# Altium PCB 3D_Scanner_PCB.PcbDoc
Units mm, origin at the board's own origin, x right, y up, seen from the top; angles counter-clockwise.
Board outline 93 x 105 mm, 2 copper layers (Top Layer, Bottom Layer); 20 components, 24 nets, 143 pads, 12 vias.
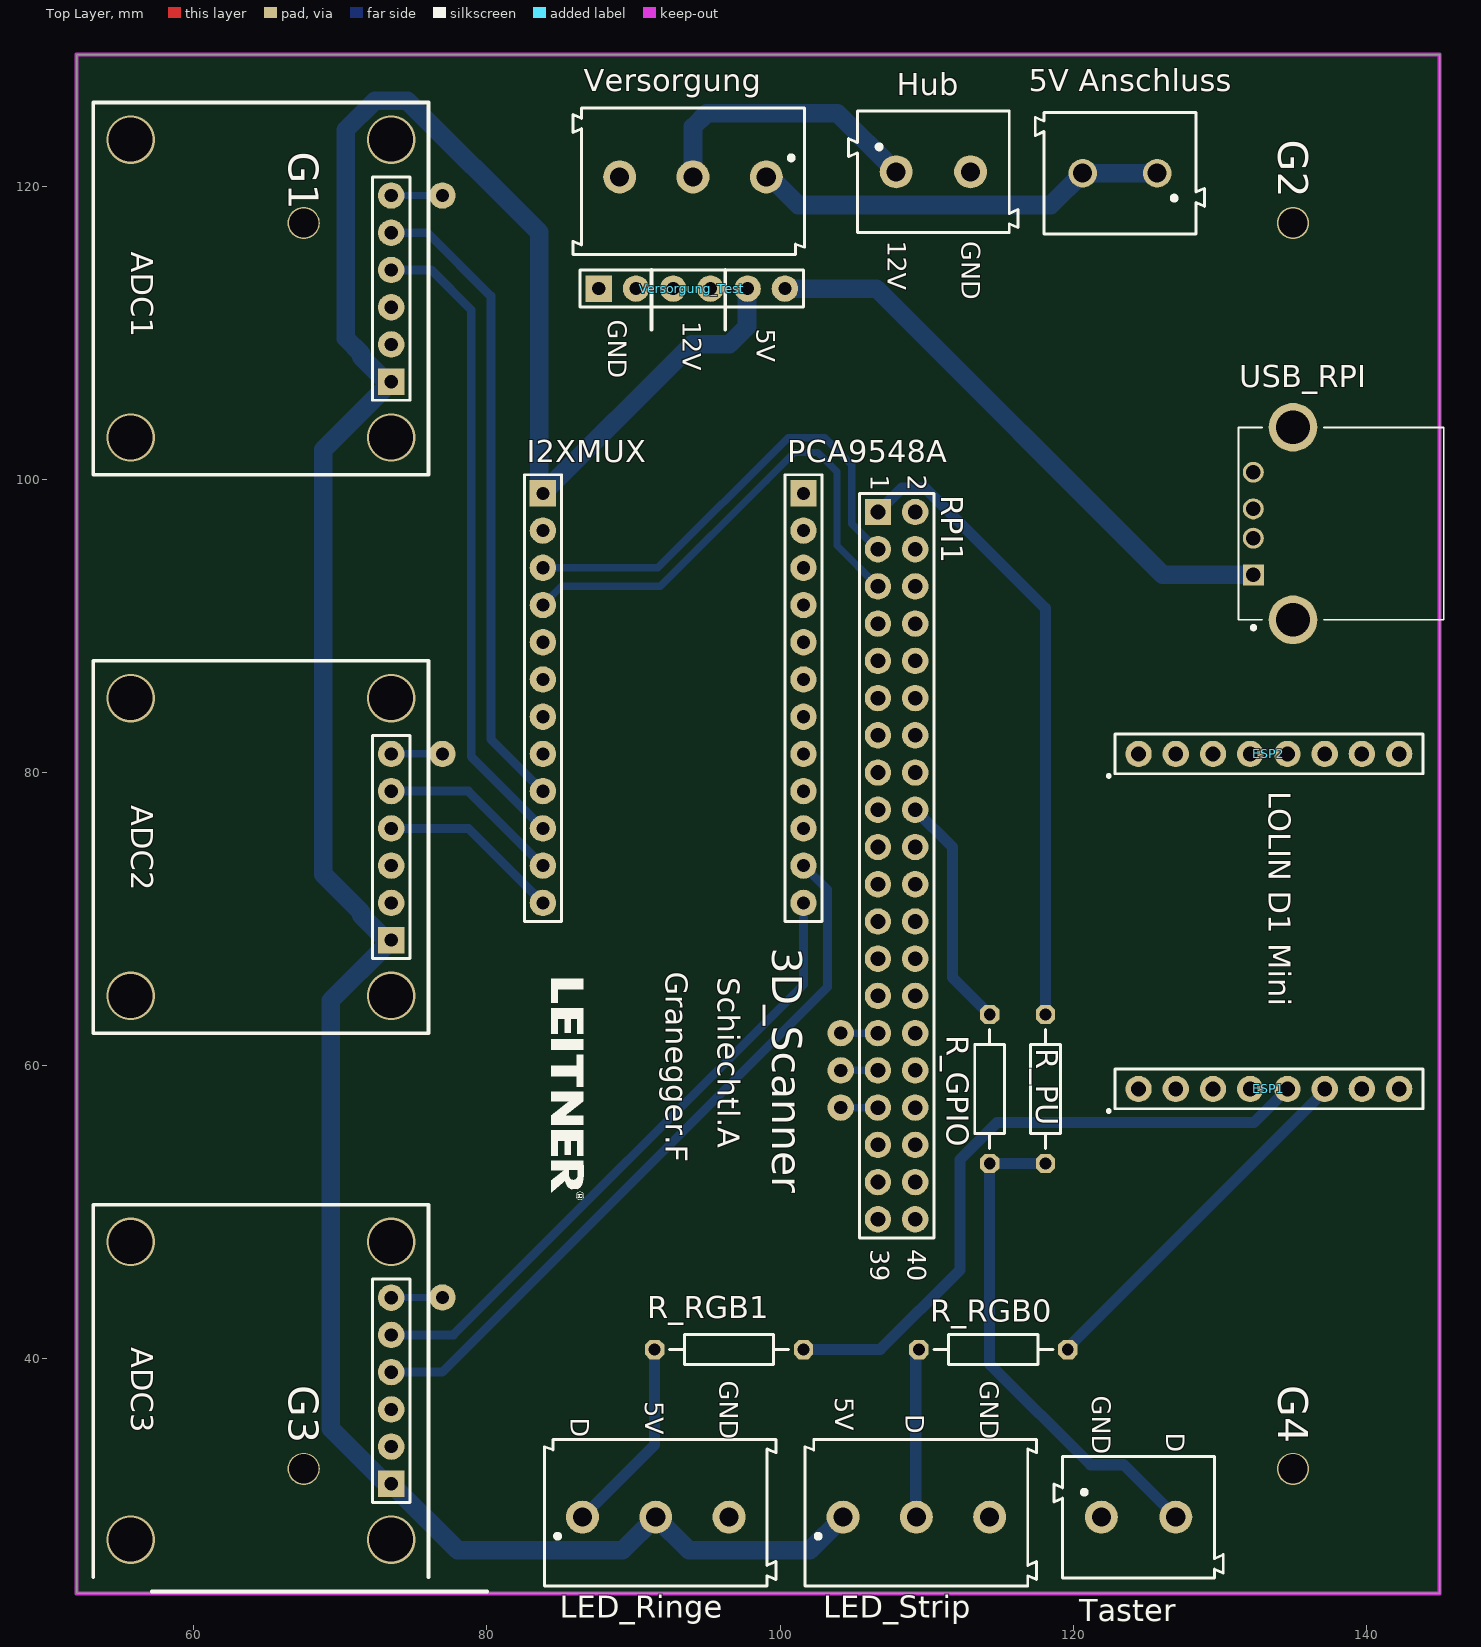
[diagram p0: Top Layer view]
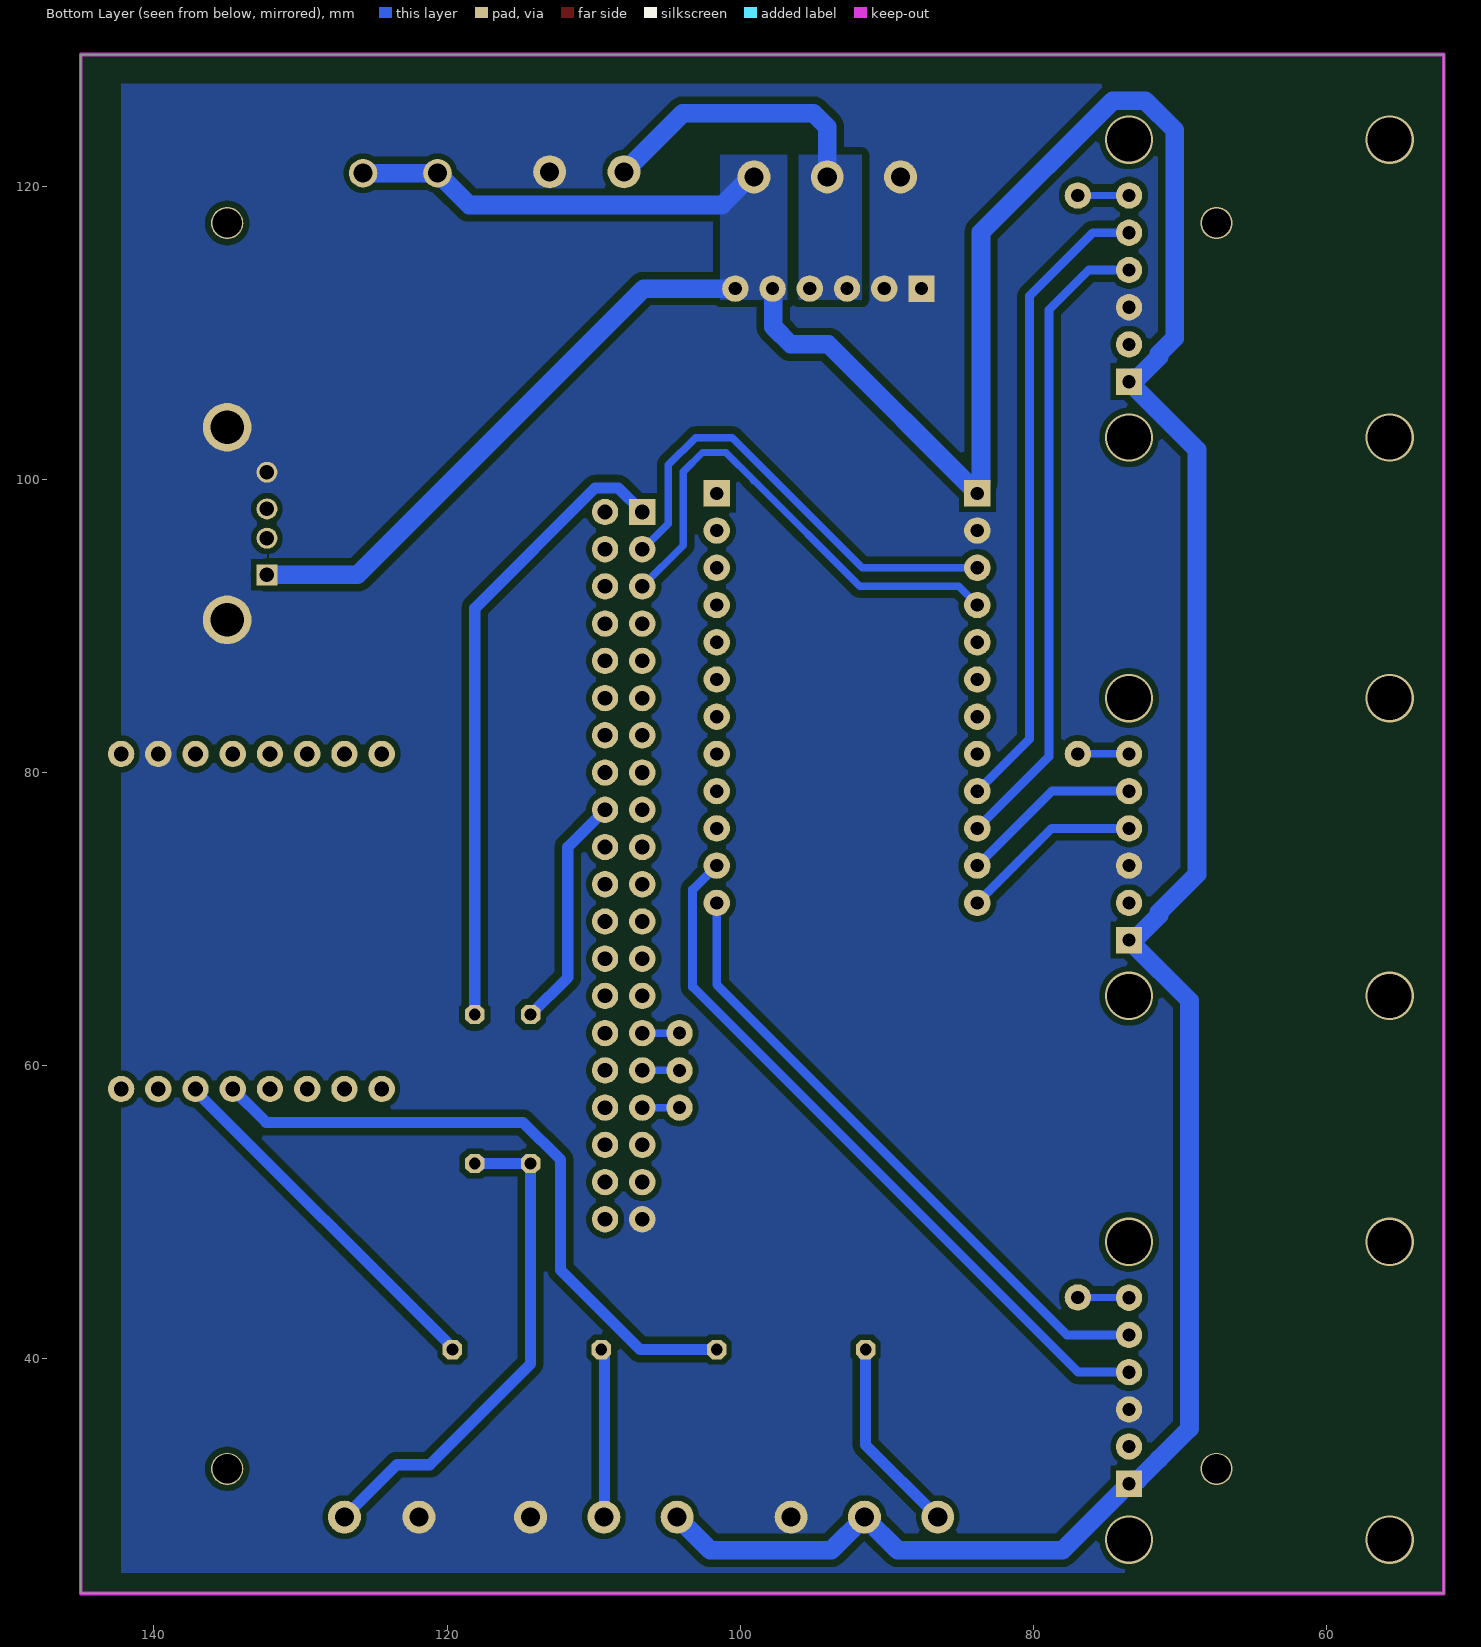
[diagram p1: Bottom Layer view, seen from below]
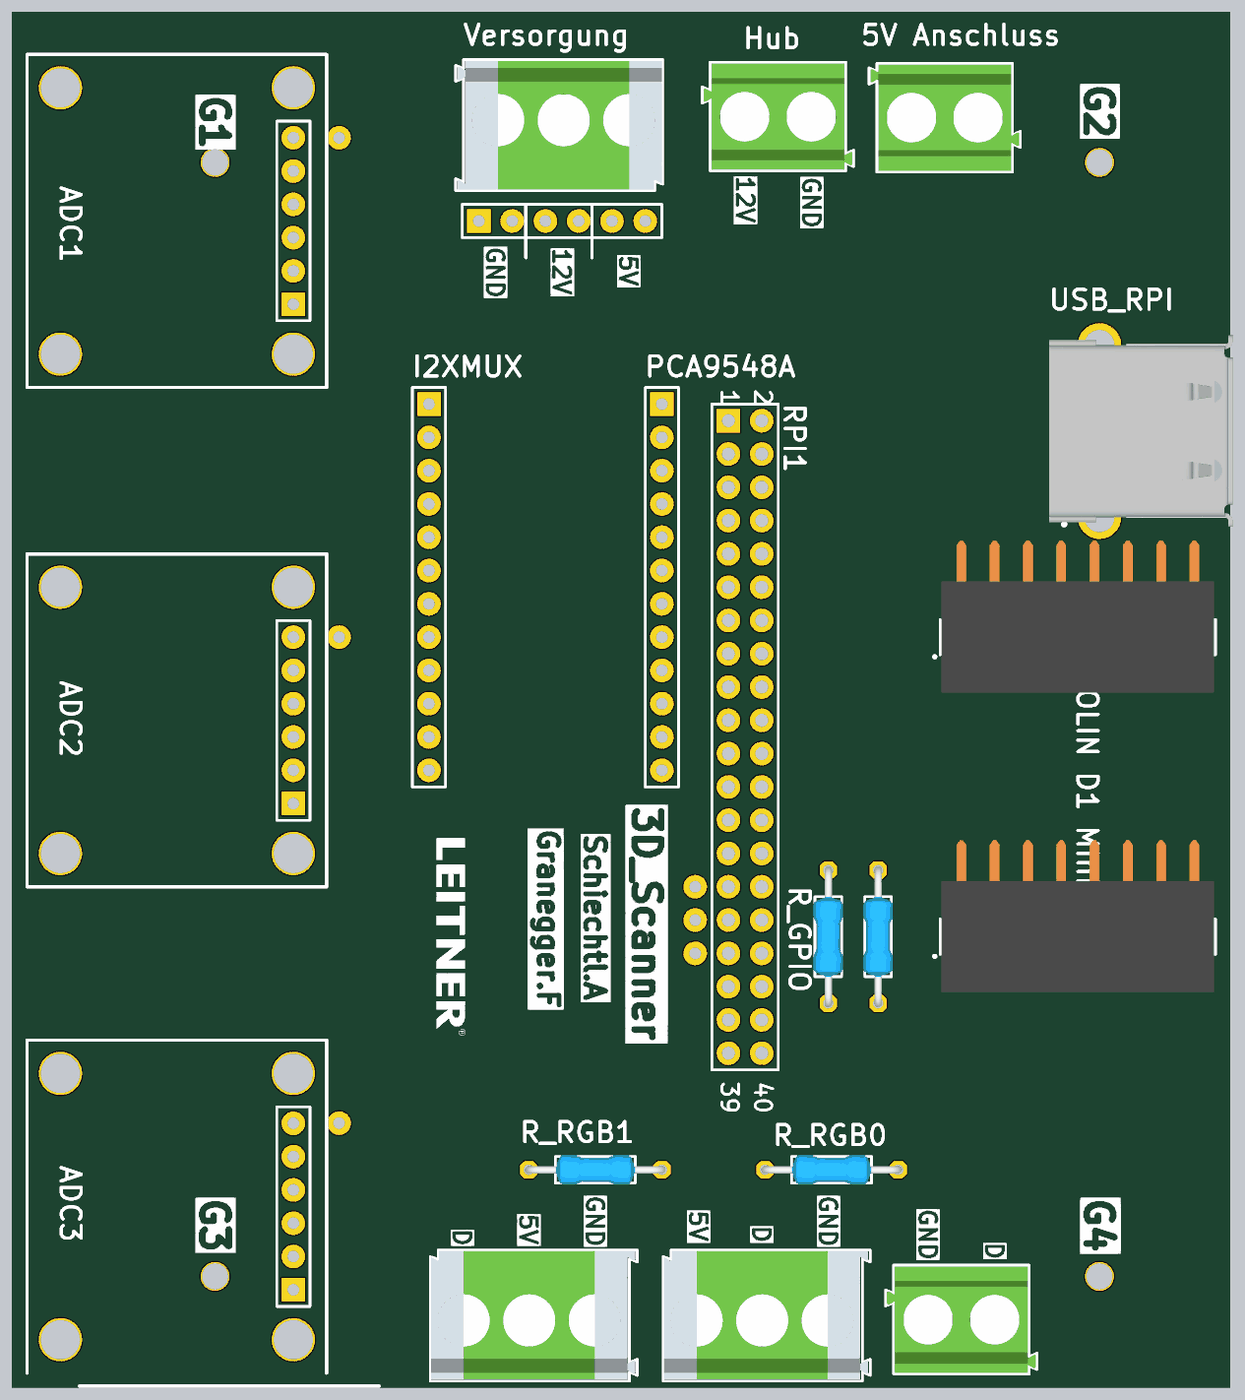
[diagram p2: 3D render of the assembled board from above, using the file's embedded part models]

## Layer stack, top to bottom
Top Solder: solder mask 0.0102, Solder Resist, Dk 3.5
Top Layer: signal copper 0.0356
Dielectric 1: dielectric 0.32, FR-4, Dk 4.8
Bottom Layer: signal copper 0.0356
Bottom Solder: solder mask 0.0102, Solder Resist, Dk 3.5

## Board outline
52,24 52,129 145,129 145,24

## Design rules (kind name [scope] priority, off if disabled: settings)
Clearance [All] p1: gap=0.381 ignorepadtopadclearanceinfootprint=FALSE except(0.508: Arc-Arc Arc-Track Arc-THPad Arc-Fill Arc-Poly Arc-Region Track-Track Track-THPad Track-Fill Track-Poly Track-Region Fill-Fill Fill-Poly Fill-Region Fill-Text Fill-Hole Poly-Poly Poly-Region Poly-Text Poly-Hole Region-Region Region-Text Region-Hole)
PlaneClearance [InNet('No Net')] p1: clearance=0.508
PlaneConnect [All] p1: planeconnectstyle=Direct reliefexpansion=0.508 reliefentries=4 reliefconductorwidth=0.254 reliefairgap=0.254
PolygonConnect [All] p1: connectstyle=Direct reliefconductorwidth=0.254 reliefentries=4 polygonreliefangle="90 Angle" airgapwidth=0.254
RoutingVias [All] p1: holewidth=0.711 width=1.27 viastyle="Through Hole" minholewidth=0.711 minwidth=1.27 maxholewidth=0.711 maxwidth=1.27
SolderMaskExpansion [All] p1: expansion=0.102 istentingtop=FALSE
SupplyNets "Schematic Supply Nets_20" [InNet('D3_1')] p1: voltage=0.000
SupplyNets "Schematic Supply Nets_19" [InNet('D3_2')] p2: voltage=0.000
SupplyNets "Schematic Supply Nets_9" [InNet('D2_2')] p3: voltage=0.000
SupplyNets "Schematic Supply Nets_8" [InNet('D2_1')] p4: voltage=0.000
SupplyNets "Schematic Supply Nets_6" [InNet('D1_2')] p5: voltage=0.000
SupplyNets "Schematic Supply Nets_5" [InNet('D1_1')] p6: voltage=0.000
SupplyNets "Schematic Supply Nets_4" [InNet('GPIO_BTN')] p7: voltage=0.000
SupplyNets "Schematic Supply Nets_3" [InNet('3V3')] p8: voltage=0.000
SupplyNets "Schematic Supply Nets_18" [InNet('SDA2')] p9: voltage=0.000
SupplyNets "Schematic Supply Nets_17" [InNet('SDA3')] p10: voltage=0.000
SupplyNets "Schematic Supply Nets_16" [InNet('SCL2')] p11: voltage=0.000
SupplyNets "Schematic Supply Nets_15" [InNet('SCL3')] p12: voltage=0.000
SupplyNets "Schematic Supply Nets_14" [InNet('SDA1')] p13: voltage=0.000
SupplyNets "Schematic Supply Nets_13" [InNet('SCL1')] p14: voltage=0.000
SupplyNets "Schematic Supply Nets_12" [InNet('SCL')] p15: voltage=0.000
SupplyNets "Schematic Supply Nets_11" [InNet('PWM0')] p16: voltage=0.000
SupplyNets "Schematic Supply Nets_10" [InNet('SDA')] p17: voltage=0.000
SupplyNets "Schematic Supply Nets_7" [InNet('PWM1')] p18: voltage=0.000
SupplyNets "Schematic Supply Nets_2" [InNet('+5V')] p19: voltage=0.000
SupplyNets "Schematic Supply Nets_1" [InNet('GND')] p20: voltage=0.000
SupplyNets "Schematic Supply Nets" [InNet('+12V')] p21: voltage=0.000
Width [All] p1: maxlimit=1.27 minlimit=0.254 preferedwidth=0.254 minimp=50.000000 maximp=50.000000 favimp=50.000000
28 further rules are at their usual default settings.

## Components (designator, comment, footprint, x,y, rotation, side; value= is the part's Value field where it differs from the comment)
"5V Anschluss" "691213510002" 691213510002#1 123.19,120.904 r180 top
ADC1 "NAU7802" HDR1X6 73.47,106.68 r90 top
ADC2 "NAU7802" HDR1X6 73.47,68.58 r90 top
ADC3 "NAU7802" HDR1X6 73.47,31.48 r90 top
ESP1 "6130XX11821_61300811821" 61300811821 133.35,58.42 r0 top
ESP2 "6130XX11821_61300811821" 61300811821 133.35,81.28 r0 top
Hub "691213510002" 691213510002#2 110.46,121 r0 top
I2XMUX "Header 12" HDR1X12 83.82,99.06 r270 top
LED_Ringe "691216710003" 691216710003 91.52,29.21 r0 top
LED_Strip "691216710003" 691216710003 109.3,29.21 r0 top
PCA9548A "Header 12" HDR1X12 101.6,99.06 r270 top
R_GPIO "330R" R_0207/RM4 114.3,58.42 r270 top
R_PU "100K" R_0207/RM4 118.11,58.42 r270 top
R_RGB0 "330R" R_0207/RM4 114.554,40.64 r180 top
R_RGB1 "330R" R_0207/RM4 96.52,40.64 r180 top
RPI1 "Raspberry Pi 5" HDR2X20 106.68,97.79 r270 top
Taster "691213510002" 691213510002#2 124.46,29.21 r0 top
USB_RPI "6364372-2" TE_6364372-2 135,97 r90 top
Versorgung "691216710003" 691216710003 94.06,120.65 r180 top
Versorgung_Test "Aditional Pins" HDR1X6 87.63,113.03 r0 top

## Footprints (in the part's own frame and the unit in brackets; to place one, negate y for a bottom-side part, rotate by r counter-clockwise, add the part's x,y. Pads: shape width x height; smd on the part's side, far side on the other; paste and mask are expansions set on the pad)
61300811821 [mm]
  round 1.8 hole 1: 1(-8.89,0) 2(-6.35,0) 3(-3.81,0) 4(-1.27,0) 5(1.27,0) 6(3.81,0) 7(6.35,0) 8(8.89,0)
  silkscreen extent -11.02,-1.6 10.51,1.35, body extent -10.41,-4.25 10.41,7.36, height 1.25
691213510002#1 [mm]
  round 1.95 hole 1.3: 1(-2.54,0) 2(2.54,0)
  silkscreen extent -5.78,-4.15 5.78,4.15, body extent -5.68,-4.06 5.68,4.04, height 10
691213510002#2 [mm]
  round 2.25 hole 1.3: 1(-2.54,0) 2(2.54,0)
  silkscreen extent -5.78,-4.15 5.78,4.15, body extent -5.68,-4.06 5.68,4.04, height 10
691216710003 [mm]
  round 2.25 hole 1.3: 1(-5,0) 2(0,0) 3(5,0)
  silkscreen extent -7.6,-4.7 8.2,5.3, body extent -7.55,-4.57 8.05,5.23, height 13.8
HDR1X6 [mm] "Connector; Header; 6 Position"
  rect 1.8x1.8 hole 0.9: 1(0,0)
  round 1.8 hole 0.9: 2(2.54,0) 3(5.08,0) 4(7.62,0) 5(10.16,0) 6(12.7,0)
  silkscreen extent -1.27,-1.27 13.97,1.27
HDR1X12 [mm] "Connector; Header; 12 Position"
  rect 1.8x1.8 hole 0.9: 1(0,0)
  round 1.8 hole 0.9: 2(2.54,0) 3(5.08,0) 4(7.62,0) 5(10.16,0) 6(12.7,0) 7(15.24,0) 8(17.78,0) 9(20.32,0) 10(22.86,0) 11(25.4,0) 12(27.94,0)
  silkscreen extent -1.27,-1.27 29.21,1.27
HDR2X20 [mm] "Connector; Header; 20x2 Position"
  rect 1.8x1.8 hole 1: 1(0,0)
  round 1.8 hole 1: 2(0,2.54) 3(2.54,0) 4(2.54,2.54) 5(5.08,0) 6(5.08,2.54) 7(7.62,0) 8(7.62,2.54) 9(10.16,0) 10(10.16,2.54) 11(12.7,0) 12(12.7,2.54) 13(15.24,0) 14(15.24,2.54) 15(17.78,0) 16(17.78,2.54) 17(20.32,0) 18(20.32,2.54) 19(22.86,0) 20(22.86,2.54) 21(25.4,0) 22(25.4,2.54) 23(27.94,0) 24(27.94,2.54) 25(30.48,0) 26(30.48,2.54) 27(33.02,0) 28(33.02,2.54) 29(35.56,0) 30(35.56,2.54) 31(38.1,0) 32(38.1,2.54) 33(40.64,0) 34(40.64,2.54) 35(43.18,0) 36(43.18,2.54) 37(45.72,0) 38(45.72,2.54) 39(48.26,0) 40(48.26,2.54)
  silkscreen extent -1.27,-1.27 49.53,3.81
R_0207/RM4 [mil] "type 0207, RM4"
  oct 52x52 hole 31.5: 1(-200,0) 2(200,0)
  silkscreen extent -160,-40 160,40, body extent -211,-44 211,44, height 94
TE_6364372-2 [mm]
  rect 1.428x1.428 / inner round 1.428 / far side rect 1.428x1.428 hole 1: 1(-3.5,2.71)
  round 1.428 hole 1: 2(-1,2.71) 3(1,2.71) 4(3.5,2.71)
  round 3.316 hole 2.3: SH1(-6.57,0) SH2(6.57,0)
  silkscreen extent -7.2,-10.28 6.57,3.72, body extent -7.31,-10.16 7.31,3.84, height 7.43

## Part data
"5V Anschluss" Hub Taster: "2 Position Wire to Board Terminal Block Horizontal with Board 0.200 (5.08mm) Through Hole", Package=None, Check_prices=https://www.snapeda.com/parts/691213510002/W%25C3%25BCrth+Elektronik+Midcom/view-part/?ref=eda, MF="WÃ¼rth Elektronik", MP=691213510002, SnapEDA_Link=https://www.snapeda.com/parts/691213510002/W%25C3%25BCrth+Elektronik+Midcom/view-part/?ref=snap
ADC1 ADC2 ADC3 Versorgung_Test: library part "Header 6", "Header, 6-Pin", LatestRevisionDate=17-Jul-2002, LatestRevisionNote="Re-released for DXP Platform.", Publisher="Altium Limited"
ESP1 ESP2: "Female header Temperature range: -40 ... +125 Â°C Colour: Black Connector Design: Single Row / Straight / Without Shroud Connector Termination: THT Contact material: Gold-Plated Copper Gender of contacts: Female Housing Material: Polybutylene Terephthalat", Package=None, Check_prices=https://www.snapeda.com/parts/61300811821/W%25C3%25BCrth+Elektronik+Midcom/view-part/?ref=eda, MF="WÃ¼rth Elektronik", MP=61300811821, SnapEDA_Link=https://www.snapeda.com/parts/61300811821/W%25C3%25BCrth+Elektronik+Midcom/view-part/?ref=snap
I2XMUX PCA9548A: "Header, 12-Pin", LatestRevisionDate=17-Jul-2002, LatestRevisionNote="Re-released for DXP Platform.", Publisher="Altium Limited"
LED_Ringe LED_Strip Versorgung: "5.00 MM TERMINAL BLOCK;", Package=None, Check_prices=https://www.snapeda.com/parts/691216710003/W%25C3%25BCrth+Elektronik+Midcom/view-part/?ref=eda, MF="WÃ¼rth Elektronik", MP=691216710003, SnapEDA_Link=https://www.snapeda.com/parts/691216710003/W%25C3%25BCrth+Elektronik+Midcom/view-part/?ref=snap
R_GPIO R_PU R_RGB0 R_RGB1: library part R, "Resistor", LatestRevisionDate=07-Sep-2019, Published=21-Feb-2011, Usage="only permitted for non-commercial purposes at HTL I Innsbruck"
RPI1: library part "Header 20X2", "Header, 20-Pin, Dual row", LatestRevisionDate=17-Jul-2002, LatestRevisionNote="Re-released for DXP Platform.", Publisher="Altium Limited"
USB_RPI: "Conn USB 2.0 Type A RCP 4 POS Solder RA Thru-Hole 4 Terminal 1 Port Box/Tube", Package=None, Check_prices=https://www.snapeda.com/parts/6364372-2/TE+Connectivity+AMP+Connectors/view-part/?ref=eda, Digi-Key_Part_Number=A122647-ND, EU_RoHS_Compliance=Compliant, MF="TE Connectivity", MP=6364372-2, Purchase-URL=https://pricing.snapeda.com/search/part/6364372-2/?ref=eda, SnapEDA_Link=https://www.snapeda.com/parts/6364372-2/TE+Connectivity+AMP+Connectors/view-part/?ref=snap

## Free pads (board coordinates)
  round 1.8 hole 0.9: 2(76.962,119.38) 3(76.962,44.196) 4(76.962,81.28) 5(104.14,62.23) 6(104.14,59.69) 7(104.14,57.15)
  round 2.2 hole 2: 8(135,117.5) 9(135,32.5) 10(67.5,32.5) 11(67.5,117.5)

## Via types
v1: diameter 3.3, hole 3, Top Layer to Bottom Layer, 12 vias

## Nets (pads, with @x,y where several pads share a name; then routed paths per layer and width w, separated by ;. In a path a pad name is that pad's centre, name@x,y a point inside that pad or via, vN(x,y) a via of type N, cw(c..) or ccw(c..) an arc to the next point about the centre after c; other vN are vias at no path point)
3V3: R_PU.1 RPI1.1 | length 43.5
  Bottom Layer w0.762: RPI1.1 108.319,99.429 109.899,99.429 118.11,91.218 R_PU.1@118.11,63.263
+5V: "5V Anschluss.1" "5V Anschluss.2" ADC1.1 ADC2.1 ADC3.1 I2XMUX.1 LED_Ringe.2 LED_Strip.1 USB_RPI.1 Versorgung.1 Versorgung_Test.5 Versorgung_Test.6 | length 261.3
  Bottom Layer w1.27: ADC2.1@73.295,68.405 69.342,64.452 69.342,35.259 71.427,33.174 72.856,31.745 73.205,31.745 78.008,26.942 89.252,26.942 LED_Ringe.2 93.788,26.942 102.032,26.942 LED_Strip.1 ; ADC2.1 73.205,68.845 72.856,68.845 71.427,70.274 71.427,70.486 68.834,73.079 68.834,102.044 ADC1.1 73.205,106.945 72.856,106.945 71.427,108.374 71.427,108.586 70.358,109.655 70.358,123.848 72.366,125.856 74.574,125.856 83.566,116.864 I2XMUX.1@83.566,99.822 ; I2XMUX.1 93.98,109.22 96.538,109.22 97.746,110.428 97.746,112.986 Versorgung_Test.5 ; Versorgung.1 99.325,120.65 101.243,118.732 118.478,118.732 120.65,120.904 125.73,120.904 ; Versorgung_Test.6 106.576,113.03 126.106,93.5 USB_RPI.1
+12V: Hub.1 Versorgung.2 Versorgung_Test.3 Versorgung_Test.4 | length 19.3
  Bottom Layer w1.27: Versorgung.2 94.06,124.06 95,125 103.92,125 Hub.1
D1_1: ADC1.6 pad.2 | length 3.8
  Bottom Layer w0.508: ADC1.6 pad.2@77.28,119.38
D1_2: pad.5 RPI1.29 | length 2.5
  Bottom Layer w0.508: pad.5 RPI1.29
D2_1: ADC2.6 pad.4 | length 3.5
  Bottom Layer w0.508: ADC2.6 pad.4
D2_2: pad.6 RPI1.31 | length 2.5
  Bottom Layer w0.508: pad.6 RPI1.31
D3_1: ADC3.6 pad.3 | length 3.5
  Bottom Layer w0.508: ADC3.6 pad.3
D3_2: pad.7 RPI1.33 | length 2.5
  Bottom Layer w0.508: pad.7 RPI1.33
GND: ADC1.3 ADC2.3 ADC3.3 ESP2.7 Hub.2 I2XMUX.2 LED_Ringe.3 LED_Strip.3 RPI1.39 Taster.1 USB_RPI.4 USB_RPI.SH1 USB_RPI.SH2 Versorgung.3 Versorgung_Test.1 Versorgung_Test.2 | length 0.3
  Bottom Layer w1.27: ADC1.3 73.514,111.716 ADC1.3@73.514,111.494
GPIO_BTN: R_GPIO.1 RPI1.18 | length 16.1
  Bottom Layer w0.762: RPI1.18 111.76,74.93 111.76,66.04 R_GPIO.1
NetESP1_5: ESP1.5 R_RGB1.1 | length 44.8
  Bottom Layer w0.762: R_RGB1.1 106.832,40.64 112.268,46.076 112.268,53.594 114.808,56.134 132.334,56.134 ESP1.5
NetESP1_6: ESP1.6 R_RGB0.1 | length 25
  Bottom Layer w0.762: R_RGB0.1 119.634,40.767 137.16,58.293 ESP1.6
NetR_GPIO_2: R_GPIO.2 R_PU.2 Taster.2 | length 34.5
  Bottom Layer w0.762: R_PU.2 R_GPIO.2 114.3,39.662 121.178,32.784 123.426,32.784 Taster.2
PWM0: LED_Strip.2 R_RGB0.2 | length 11.5
  Bottom Layer w0.762: LED_Strip.2 109.26,29.25 109.26,40.426 R_RGB0.2
PWM1: LED_Ringe.1 R_RGB1.2 | length 13.5
  Bottom Layer w0.762: LED_Ringe.1 91.44,34.13 R_RGB1.2 R_RGB1.2@91.48,40.6
SCL: I2XMUX.4 RPI1.5 | length 33.9
  Bottom Layer w0.508: I2XMUX.4 85.09,92.71 91.836,92.71 99.06,99.934 100.972,101.846 102.572,101.846 103.886,100.532 103.886,95.504 RPI1.5
SCL1: ADC1.4 I2XMUX.10 | length 44
  Bottom Layer w0.61: ADC1.4 76.2,114.3 78.931,111.569 78.931,81.089 I2XMUX.10
SCL2: ADC2.4 I2XMUX.12 | length 12.5
  Bottom Layer w0.61: ADC2.4 78.74,76.2 I2XMUX.12
SCL3: ADC3.4 PCA9548A.11 | length 49.6
  Bottom Layer w0.61: ADC3.4 76.946,39.1 103.239,65.393 103.239,72.021 PCA9548A.11
SDA: I2XMUX.3 RPI1.3 | length 31.3
  Bottom Layer w0.508: I2XMUX.3@84.58,93.98 91.669,93.98 100.551,102.862 103.045,102.862 104.902,101.005 104.902,96.99 106.642,95.25 RPI1.3
SDA1: ADC1.5 I2XMUX.9 | length 43.8
  Bottom Layer w0.61: ADC1.5 75.946,116.84 80.264,112.522 80.264,82.296 I2XMUX.9
SDA2: ADC2.5 I2XMUX.11 | length 12.5
  Bottom Layer w0.61: ADC2.5 78.74,78.74 I2XMUX.11
SDA3: ADC3.5 PCA9548A.12 | length 43.6
  Bottom Layer w0.61: ADC3.5 77.708,41.64 101.6,65.532 PCA9548A.12
pads on no net: ADC1.2 ADC2.2 ADC3.2 ESP1.1 ESP1.2 ESP1.3 ESP1.4 ESP1.7 ESP1.8 ESP2.1 ESP2.2 ESP2.3 ESP2.4 ESP2.5 ESP2.6 ESP2.8 I2XMUX.5 I2XMUX.6 I2XMUX.7 I2XMUX.8 PCA9548A.1 PCA9548A.2 PCA9548A.3 PCA9548A.4 PCA9548A.5 PCA9548A.6 PCA9548A.7 PCA9548A.8 PCA9548A.9 PCA9548A.10 RPI1.2 RPI1.4 RPI1.6 RPI1.7 RPI1.8 RPI1.9 RPI1.10 RPI1.11 RPI1.12 RPI1.13 RPI1.14 RPI1.15 RPI1.16 RPI1.17 RPI1.19 RPI1.20 RPI1.21 RPI1.22 RPI1.23 RPI1.24 RPI1.25 RPI1.26 RPI1.27 RPI1.28 RPI1.30 RPI1.32 RPI1.34 RPI1.35 RPI1.36 RPI1.37 RPI1.38 RPI1.40 USB_RPI.2 USB_RPI.3
copper on no net:
  other v1: 55.69,27.67 73.47,27.67 55.69,47.99 73.47,47.99 55.69,64.77 73.47,64.77 55.69,85.09 73.47,85.09 55.69,102.87 73.47,102.87 55.69,123.19 73.47,123.19

## Polygon pours and split planes (outlines as drawn)
GND on Bottom Layer "GND_L02_P004" (solid, remove dead copper, pour order 4): 68.58,127 142.24,127 142.24,25.4 68.58,25.4
+5V on Bottom Layer "+5V_L02_P000" (solid, remove dead copper, pour order 0): 96.774,112.268 101.346,112.268 101.346,122.174 96.774,122.174
+12V on Bottom Layer "+12V_L02_P001" (solid, remove dead copper, pour order 1): 96.012,122.174 96.012,112.268 91.694,112.268 91.694,122.174

## Keep-outs
Keep-Out Layer:
  the board outline again, w0.254

## Silkscreen, mask and mechanical layers (free items; w line width, h text height)
Top Overlay:
  drawing of 26 lines, arcs and shapes, not listed
  text "G2" at 133.984,123.193 h2.03 r270
  text "G1" at 66.484,122.354 h2.03 r270
  text "12V" at 107.345,116.307 h1.27 r270
  text "GND" at 112.395,116.247 h1.27 r270
  text "GND" at 88.265,110.913 h1.27 r270
  text "12V" at 93.345,110.807 h1.27 r270
  text "5V" at 98.425,110.278 h1.27 r270
  text "LOLIN D1 Mini" at 133.35,78.74 h1.52 r270
  text "3D_Scanner" at 99.484,68.069 h2.03 r270
  text "Granegger.F" at 92.202,66.418 h1.52 r270
  text "Schiechtl.A" at 95.758,66.038 h1.52 r270
  text "GND" at 95.885,38.523 h1.27 r270
  text "GND" at 113.665,38.523 h1.27 r270
  text "G3" at 66.484,38.193 h2.03 r270
  text "G4" at 133.984,38.193 h2.03 r270
  text "GND" at 121.285,37.507 h1.27 r270
  text "5V" at 103.759,37.38 h1.27 r270
  text "5V" at 90.805,37.126 h1.27 r270
  text "D" at 108.585,36.237 h1.27 r270
  text "D" at 85.725,35.983 h1.27 r270
  text "D" at 126.365,34.967 h1.27 r270

## Dimensions
52,24 to 52,129 on Mechanical 15
52,24 to 145,129 on Mechanical 15

## Text inside footprints (layer, text, board x,y; h text height)
RPI1: Top Overlay "39" at 106.172,47.498 h1.27 r270; Top Overlay "40" at 108.712,47.498 h1.27 r270; Top Overlay "2" at 108.712,100.33 h1.27 r270; Top Overlay "1" at 106.172,100.33 h1.27 r270